# EAGLE board swd (EAGLE 6.1)
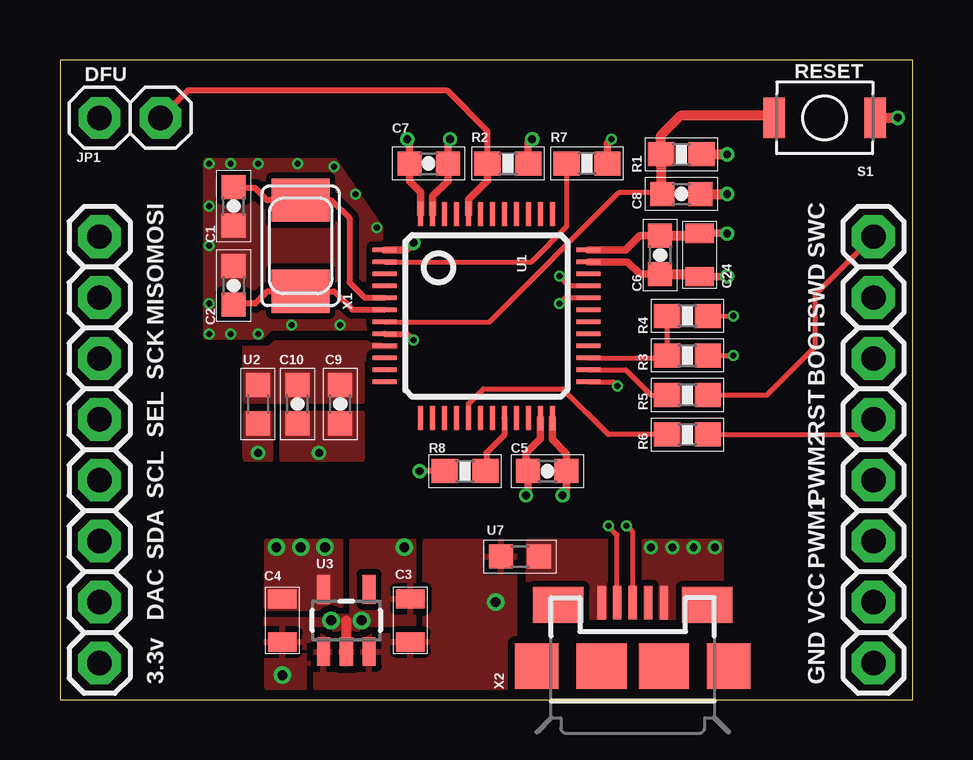
[diagram p0: board, top side]
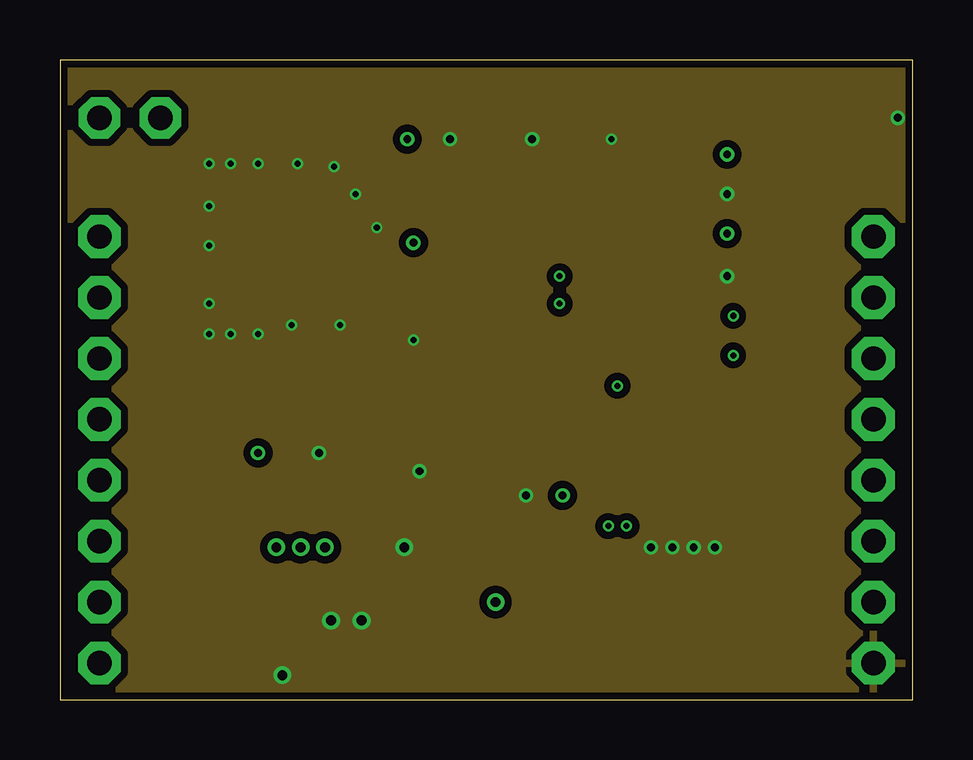
[diagram p1: board, inner layer Route2]
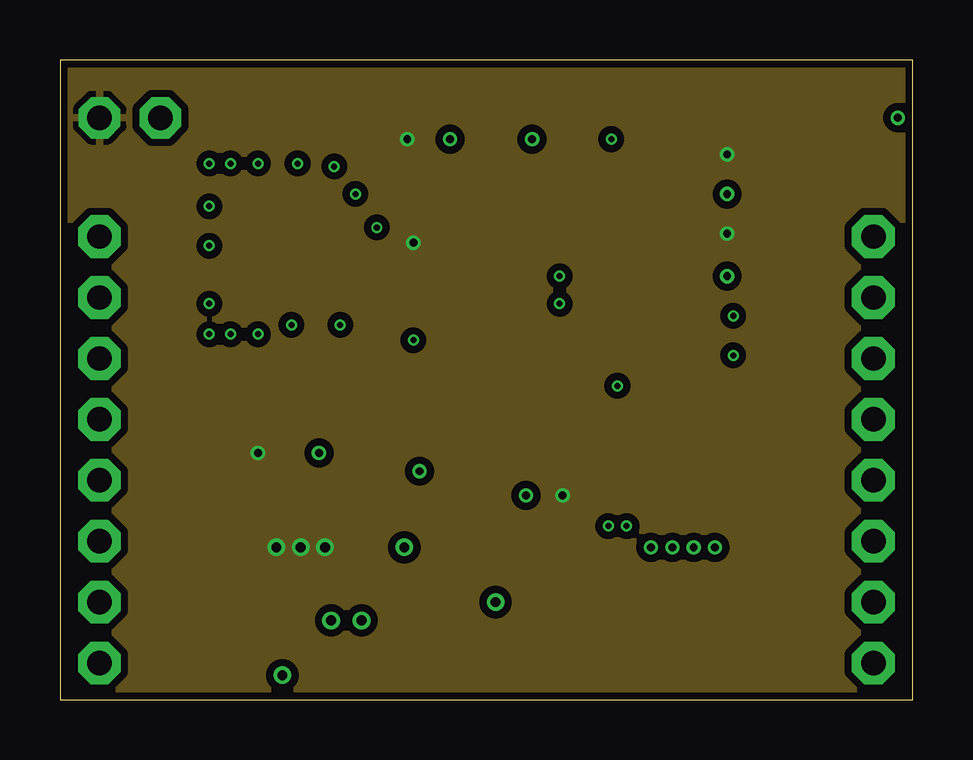
[diagram p2: board, inner layer Route15]
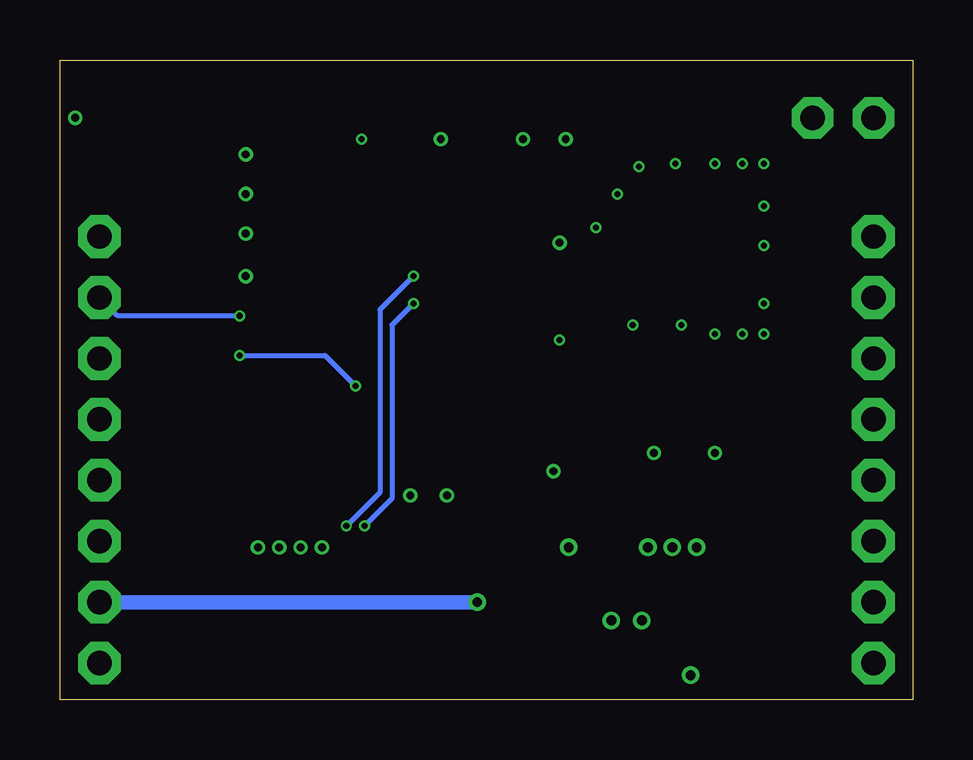
[diagram p3: board, bottom side, seen from below]

Size 35.56 x 26.67 mm. Coordinates in mm from the lower left corner, seen from the top.
Outline: 0,0 35.56,0 35.56,26.67 0,26.67 0,0
Copper layers (1*2+15*16): Top 0.035mm / dielectric 1.5mm / Route2 0.035mm / dielectric 0.15mm / Route15 0.035mm / dielectric 0.2mm / Bottom 0.035mm
Design rules: minimum track width 5mil, minimum drill 10mil, track to track 6mil, track to pad 6mil, pad to pad 6mil, via to via 6mil, smd to smd 6mil, copper to edge 5mil, drill to drill 10mil, minimum pad ring 10mil, minimum via ring 4mil, stop-mask expansion 2mil, vias tented up to drill 30mil, thermal gap 10mil
Net classes: 1 vcc: width 1.016 mm, clearance 0.203 mm; 2 antenna: width 0.363 mm, clearance 0.305 mm; 3 1.8v: width 0.457 mm, clearance 0.254 mm

## Footprints (pad centres in the part's own frame; a part is rotated, then mirrored left to right if it is on the bottom)
0603-CAP = smd 1 x 1: 1 -0.8,0; 2 0.8,0
0805 = smd 0.8 x 1.2: 1 -0.9,0; 2 0.9,0
1X02 = drill 1.016 octagon: 1 -1.27,0; 2 1.27,0
0603-RES = smd 1.1 x 1: 1 -0.85,0; 2 0.85,0
3X4X2TACT = smd 0.9 x 1.7: P$1 -2.1,0; P$2 2.1,0
LQFP48 = smd 0.2 x 1: 1 -2.75,-4.25; 2 -2.25,-4.25; 3 -1.75,-4.25; 4 -1.25,-4.25; 5 -0.75,-4.25; 6 -0.25,-4.25; 7 0.25,-4.25; 8 0.75,-4.25; 9 1.25,-4.25; 10 1.75,-4.25; 11 2.25,-4.25; 12 2.75,-4.25; 25 2.75,4.25; 26 2.25,4.25; 27 1.75,4.25; 28 1.25,4.25; 29 0.75,4.25; 30 0.25,4.25; 31 -0.25,4.25; 32 -0.75,4.25; 33 -1.25,4.25; 34 -1.75,4.25; 35 -2.25,4.25; 36 -2.75,4.25 | smd 1 x 0.2: 13 4.25,-2.75; 14 4.25,-2.25; 15 4.25,-1.75; 16 4.25,-1.25; 17 4.25,-0.75; 18 4.25,-0.25; 19 4.25,0.25; 20 4.25,0.75; 21 4.25,1.25; 22 4.25,1.75; 23 4.25,2.25; 24 4.25,2.75; 37 -4.25,2.75; 38 -4.25,2.25; 39 -4.25,1.75; 40 -4.25,1.25; 41 -4.25,0.75; 42 -4.25,0.25; 43 -4.25,-0.25; 44 -4.25,-0.75; 45 -4.25,-1.25; 46 -4.25,-1.75; 47 -4.25,-2.25; 48 -4.25,-2.75
0603 = smd 1 x 1: 1 -0.8,0; 2 0.8,0
SOT23-5 = smd 0.55 x 1.2: 1 -0.95,-1.3; 2 0,-1.3; 3 0.95,-1.3; 4 0.95,1.3; 5 -0.95,1.3
OPENMV3 = drill 1.016 pad 1.778 octagon: 11 1.651,19.304; 12 1.651,16.764; 13 1.651,14.224; 14 1.651,11.684; 15 1.651,9.144; 16 1.651,6.604; 17 1.651,4.064; 18 1.651,1.524; 21 33.909,19.304; 22 33.909,16.764; 23 33.909,14.224; 24 33.909,11.684; 25 33.909,9.144; 26 33.909,6.604; 27 33.909,4.064; 28 33.909,1.524
NX5032 = smd 1.8 x 2.4: P$1 1.9,0; P$2 -1.9,0
USB-MICROB = smd 0.35 x 1.4: D+ 0,2.65; D- -0.65,2.65; GND 1.3,2.65; ID 0.65,2.65; VBUS -1.3,2.65 | smd 1.8 x 1.9: MT1 -4,0; MT2 4,0 | smd 2.1 x 1.5: MT3 3.1,2.55; MT4 -3.1,2.55 | smd 2.1 x 1.9: MT5 -1.3,0; MT6 1.3,0

## Placement (x,y rotation side)
C1  18pF  [0603-CAP]  7.24,20.57 90 top
C2  18pF  [0603-CAP]  7.24,17.27 270 top
C3  10uF  [0805]  14.61,3.3 90 top
C4  10uF  [0805]  9.27,3.3 270 top
C5  0.1uF  [0603-CAP]  20.32,9.53 0 top
C6  0.1uF  [0603-CAP]  25.02,18.54 90 top
C7  0.1uF  [0603-CAP]  15.37,22.35 180 top
C8  0.1uF  [0603-CAP]  25.91,21.08 180 top
C9  0.1uF  [0603-CAP]  11.68,12.32 90 top
C10  1uF  [0603-CAP]  9.91,12.32 90 top
C24  10uF  [0805]  26.67,18.54 90 top
JP1  [1X02]  2.92,24.26 0 top
R1  10K  [0603-RES]  25.91,22.73 180 top
R2  10K  [0603-RES]  18.67,22.35 180 top
R3  100R  [0603-RES]  26.16,14.35 180 top
R4  33R  [0603-RES]  26.16,16 0 top
R5  33R  [0603-RES]  26.16,12.7 0 top
R6  33R  [0603-RES]  26.16,11.05 0 top
R7  10K  [0603-RES]  21.97,22.35 0 top
R8  10K  [0603-RES]  16.89,9.53 0 top
S1  SPST_3X4X2  [3X4X2TACT]  31.88,24.26 180 top
U1  STM32F103C8T6  [LQFP48]  17.78,16 270 top
U2  [0603]  8.26,12.32 270 top
U3  3.3v  [SOT23-5]  11.94,3.3 0 top
U7  [0603]  19.18,5.97 180 top
U$2  OPENMV3  [OPENMV3]  0,0 0 top
X1  8MHz  [NX5032]  10.03,18.92 90 top
X2  USB-MICROB  [USB-MICROB]  23.88,1.4 0 top

## Library data of the parts
C1-C10 C24 R1-R8 U2 U7 X2 = sfe
JP1 = pinhead
S1 = bt_electromech
U1 = stm32
U3 = SparkFun
U$2 = openmv
X1 = adafruit

## Nets
3V3: C4.1 C5.2 C6.2 C7.2 C24.2 JP1.1 R1.1 U1.1 U1.24 U1.36 U1.48 U2.2 U3.5
BOOT0: JP1.2 R2.2 U1.44
BOOT1: R8.2 U1.20
FS_DM: U1.32 X2.D-
FS_DP: U1.33 X2.D+
GND: C1.1 C2.1 C3.2 C4.2 C5.1 C6.1 C7.1 C8.1 C9.1 C10.1 C24.1 R2.1 R7.2 R8.1 S1.P$1 U1.8 U1.23 U1.35 U1.47 U3.2 U$2.28 X2.GND
N$1: R5.2 U$2.21
N$2: R7.1 U1.2
N$3: R4.2 U$2.22
N$4: R6.2 U$2.24
N$6: C1.2 U1.5 X1.P$1
N$7: U7.1 X2.VBUS
N$8: C2.2 U1.6 X1.P$2
NRST: C8.2 R1.2 S1.P$2 U1.7
T_NRST: R6.1 U1.17
T_SWC: R5.1 U1.26
T_SWD: R3.2 R4.1 U1.27
T_SWD_IN: R3.1 U1.25
VBUS: C3.1 U3.1 U3.3 U7.2 U$2.27
VDDA: C9.2 C10.2 U1.9 U2.1

## Tracks (layer width: path | path; a pad name or v marks a point on that pad's centre or on a via)
3V3  (via drill 0.33, 0.41)
  Top 0.305: v14.48,23.37 14.57,23.28 C7.2 14.57,21.63 15.03,21.16 U1.48 | U1.24 20.53,10.84 21.12,10.25 C5.2 21.12,8.67 v20.95,8.51 | U1.36 23.58,18.75 24.17,19.34 C6.2 | U1.1 14.43,18.75 v14.73,19.05 | C24.2 27.8,19.44 v27.81,19.43
  Top 0.406: C6.2 26.57,19.34 C24.2 | R1.1 v27.81,22.73
  other vias: 8.26,10.29 11.05,6.35 10.03,6.35 9.02,6.35
  pour Route15 (isolate 0.305): 0,0 35.56,0 35.56,26.67 0,26.67
  pour Top (isolate 0.254, rank 2, no thermals): 7.75,10.03 7.75,11.94 8.76,11.94 8.76,10.03
  pour Top (isolate 0.254, no thermals): 8.64,3.81 8.64,6.6 11.68,6.6 11.68,3.81
BOOT0
  Top 0.254: JP1.2 5.33,25.4 16.13,25.4 17.82,23.71 R2.2
  Top 0.305: U1.44 17.03,20.84 17.82,21.63 R2.2
BOOT1
  Top 0.254: U1.20 18.53,11.04 17.78,10.29 17.78,9.56 R8.2
FS_DM  (via drill 0.25)
  Top 0.203: U1.32 21.07,16.75 v20.83,16.51 | X2.D- 23.23,6.87 v22.86,7.24
  Bottom 0.203: v20.83,16.51 21.72,15.62 21.72,8.38 v22.86,7.24
FS_DP  (via drill 0.25)
  Top 0.203: U1.33 21.23,17.25 v20.83,17.65 | X2.D+ 23.88,6.99 v23.62,7.24
  Bottom 0.203: v20.83,17.65 22.23,16.26 22.23,8.64 v23.62,7.24
GND  (via drill 0.25, 0.33, 0.41)
  Top 0.254: U1.8 14.47,15.25 v14.73,14.99 | R8.1 v14.99,9.53
  Top 0.305: v16.26,23.37 16.17,23.28 C7.1 16.17,21.63 15.53,20.99 U1.47 | R2.1 19.52,23.2 v19.68,23.37 | U1.23 20.03,10.89 19.43,10.29 19.43,9.61 C5.1 19.52,8.6 v19.43,8.51 | U1.35 23.66,18.25 24.17,17.74 C6.1 | R7.2 22.82,23.2 v22.99,23.37 | C24.1 v27.8,17.64 v27.81,17.65
  Top 0.406: C6.1 26.57,17.74 C24.1 | U3.2 11.94,3.3 | C8.1 v27.81,21.08 | S1.P$1 v34.92,24.26
  other vias: 11.3,3.3 6.22,15.24 8.26,15.24 9.65,15.62 11.68,15.62 13.21,19.68 12.32,21.08 11.43,22.23 9.91,22.35 8.26,22.35 6.22,22.35 6.22,18.92 6.22,20.57 6.22,16.51 10.79,10.29 12.57,3.3 14.35,6.35 9.27,1.02 27.3,6.35 26.42,6.35 25.53,6.35 24.64,6.35 7.11,15.24 7.11,22.35
  pour Route2 (isolate 0.305): 0,0 35.56,0 35.56,26.67 0,26.67
  pour Top (isolate 0.254, rank 2): 15.24,0.51 8.64,0.51 8.64,6.6 15.24,6.6
  pour Top (isolate 0.254, no thermals): 6.1,15.11 6.1,22.48 11.43,22.48 13.34,19.68 13.34,15.49 8.76,15.49 8.38,15.11
  pour Top (isolate 0.254, rank 2, no thermals): 9.27,10.03 9.27,11.94 12.57,11.94 12.57,10.03
  pour Top (isolate 0.254, rank 2, no thermals): 24.38,3.43 24.38,6.6 27.56,6.6 27.56,3.43
N$1
  Top 0.203: R5.2 29.46,12.7 31.5,14.73 31.5,16.89 U$2.21
N$2
  Top 0.203: U1.2 19.65,18.25 21.12,19.72 R7.1
N$3  (via drill 0.25)
  Top 0.203: R4.2 v28.07,16
  Bottom 0.203: v28.07,16 33.15,16 U$2.22
N$4
  Top 0.203: R6.2 33.27,11.05 U$2.24
N$6
  Top 0.254: U1.5 12.71,16.75 12.06,17.4 12.06,20.07 11.31,20.82 X1.P$1 8.64,20.82 8.13,21.34 7.28,21.34 C1.2
N$7
  pour Top (isolate 0.254, no thermals): 19.56,3.43 19.56,6.6 23.88,6.6 23.88,3.43
N$8
  Top 0.254: U1.6 12.19,16.26 11.43,17.02 X1.P$2 8.64,17.02 8.13,16.51 7.28,16.51 C2.2
NRST
  Top 0.203: U1.7 17.91,15.75 23.29,21.13 25.06,21.13
  Top 0.406: 29.69,24.34 25.87,24.34 25.06,23.53 R1.2 25.06,21.13
  Top 0.61: 29.69,24.34 S1.P$2 | 25.27,21.08 C8.2 25.06,21.13
T_NRST
  Top 0.203: U1.17 17.03,12.33 17.65,12.95 20.95,12.95 22.86,11.05 R6.1
T_SWC
  Top 0.203: U1.26 23.59,13.75 24.64,12.7 R5.1
T_SWD
  Top 0.203: R4.1 R3.2 25.21,14.25 U1.27
T_SWD_IN  (via drill 0.25)
  Top 0.203: R3.1 v28.07,14.35 | U1.25 23.07,13.25 v23.24,13.08
  Bottom 0.203: v28.07,14.35 24.51,14.35 v23.24,13.08
VBUS  (via drill 0.41)
  Bottom 0.61: U$2.27 v18.16,4.06
  pour Top (isolate 0.305): 18.92,0.51 10.67,0.51 10.67,2.67 15.24,2.67 15.24,6.6 18.92,6.6
VDDA
  pour Top (isolate 0.254, rank 2, no thermals): 7.75,12.45 7.75,14.86 13.97,14.86 13.97,14.22 12.57,14.22 12.57,12.45

## Text on the board
tPlace: DFU | RESET | MOSI | SWC | MISO | SWD | SCK | BOOT | SEL | RST | SCL | PWM2 | SDA | PWM1 | DAC | VCC | 3.3v | GND